# Allegro board AVRUSB500_new.brd
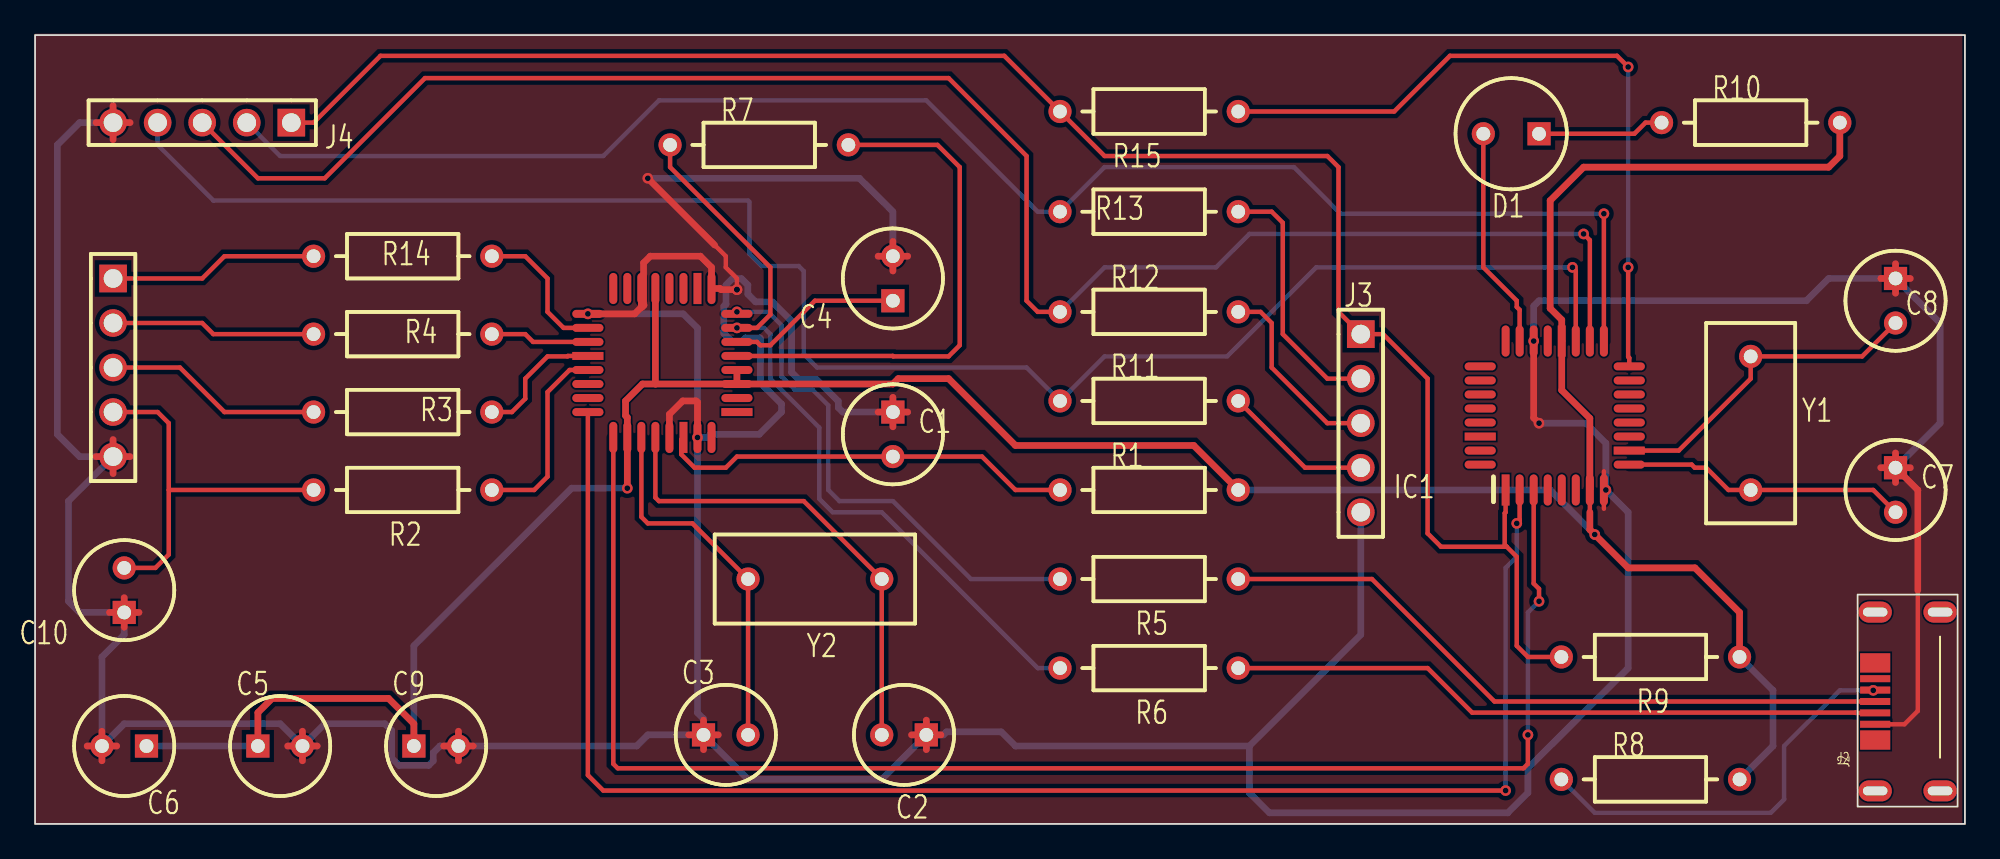
[diagram p0: board, top side]
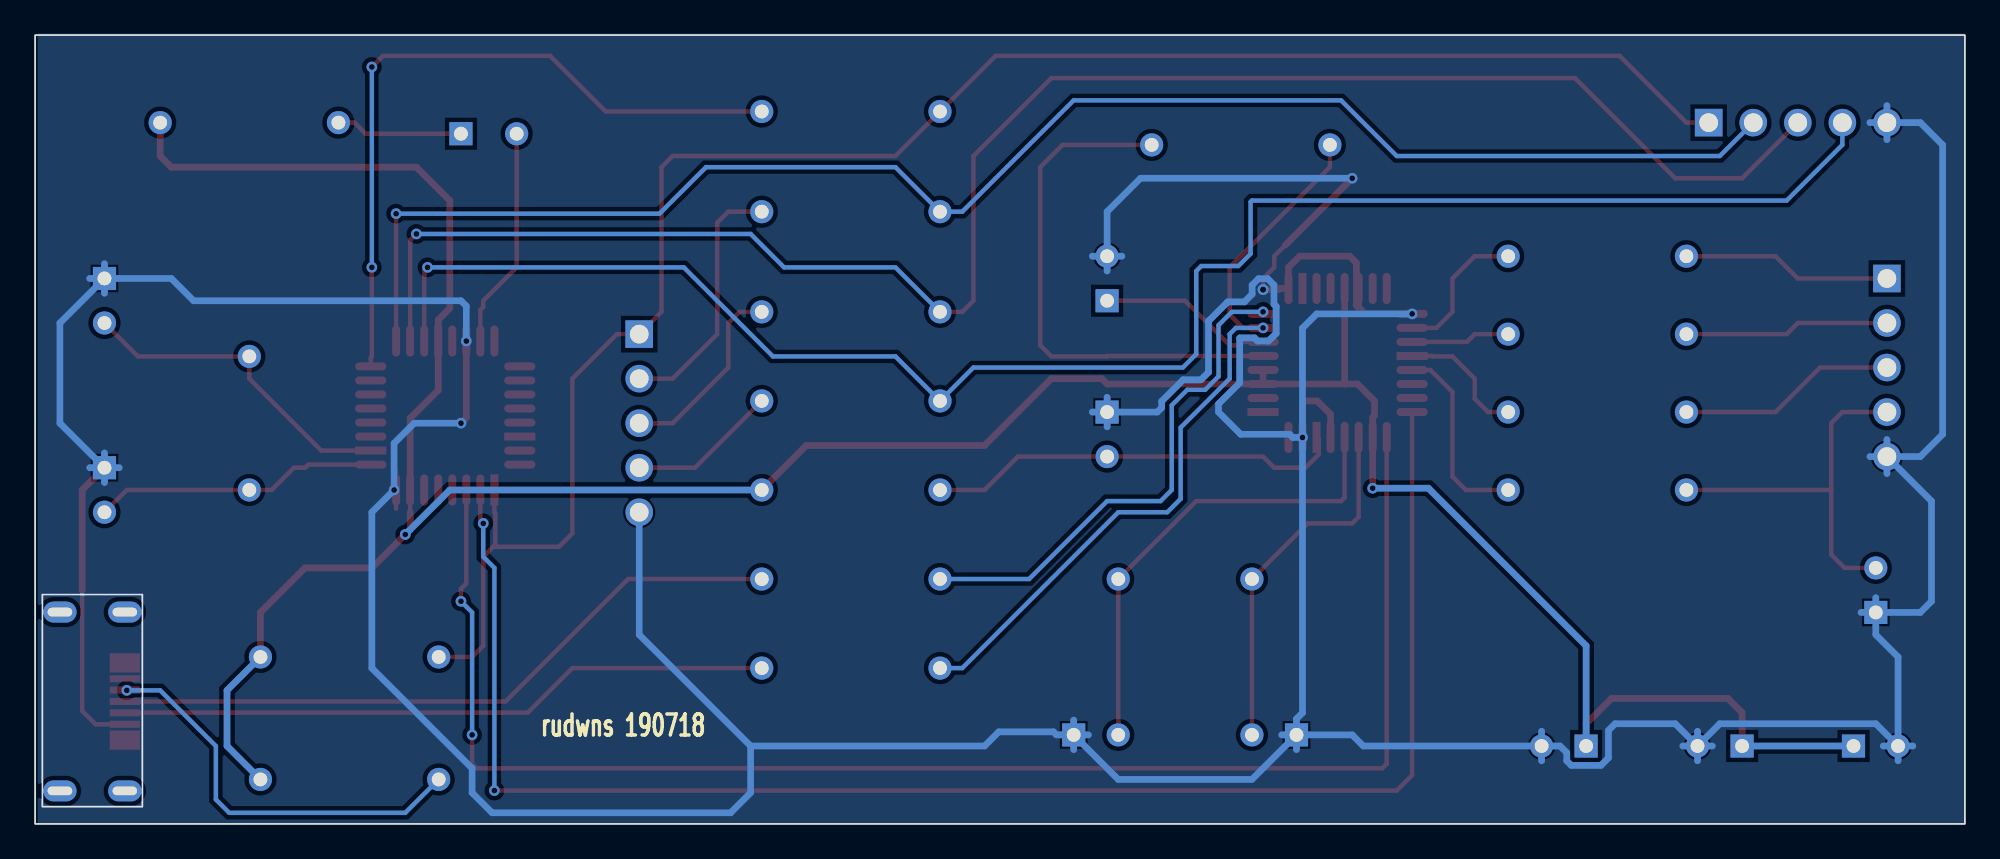
[diagram p1: board, bottom side, seen from below]

Outline 110 x 45 mm; copper layers: TOP, BOTTOM. Coordinates in mm from the lower left corner of the outline.
Outline path: rectangle 0,0 110,45

## Design rules (mm)
net group POWERNETS: nets VCC

## Placement (name value [footprint] x y rotation side)
C1  47nF  [CPCYL1D225LS100031]  48.9 23.5 270 top
C2  27pF  [CPCYL1D225LS100031]  50.8 5.08 180 top
C3  27pF  [CPCYL1D225LS100031]  38.1 5.08 0 top
C4  47nF  [CPCYL1D225LS100031]  48.9 29.84 90 top
C5  100nF  [CPCYL1D225LS100031]  12.7 4.45 0 top
C6  1uF  [CPCYL1D225LS100031]  6.35 4.45 180 top
C7  100nF  [CPCYL1D225LS100031]  106.05 20.32 270 top
C8  100nF  [CPCYL1D225LS100031]  106.05 31.11 270 top
C9  100nF  [CPCYL1D225LS100031]  21.59 4.45 0 top
C10  22nF  [CPCYL1D225LS100031]  5.08 12.06 90 top
D1  LED  [CYLD250LS125031]  85.72 39.37 180 top
IC1  ATmega8  [QUAD80M32WG900]  83.82 19.05 0 top
J1  bbpg_Bitbang  [BLKCON100VHTM1SQSW1005]  4.45 31.11 270 top
J2  USBA  [MY_USB]  108.58 6.99 90 top
J3  avrusb500_out  [BLKCON100VHTM1SQSW1005]  75.56 27.94 270 top
J4  firmware_in  [BLKCON100VHTM1SQSW1005]  14.61 40.01 180 top
NOREF  -  []  0 45 0 top
NOREF#2  -  []  110 0 90 top
R1  470  [AX400X100031]  58.42 19.05 0 top
R2  220  [AX400X100031]  26.04 19.05 180 top
R3  220  [AX400X100031]  26.04 23.5 180 top
R4  220  [AX400X100031]  26.04 27.94 180 top
R5  27  [AX400X100031]  68.58 13.97 180 top
R6  27  [AX400X100031]  68.58 8.89 180 top
R7  1.5k  [AX400X100031]  36.2 38.73 0 top
R8  2.2  [AX400X100031]  87 2.54 0 top
R9  10k  [AX400X100031]  97.16 9.53 180 top
R10  470  [AX400X100031]  92.71 40.01 0 top
R11  1k  [AX400X100031]  58.42 24.13 0 top
R12  220  [AX400X100031]  58.42 29.21 0 top
R13  1k  [AX400X100031]  58.42 34.92 0 top
R14  220  [AX400X100031]  26.04 32.38 180 top
R15  220  [AX400X100031]  68.58 40.64 180 top
U1  FT232BM  [QUAD80M32WG900]  40.01 23.5 90 top
Y1  3.6864Mhz  [RAD450X200LS300031]  97.79 26.67 270 top
Y2  6Mhz  [RAD450X200LS300031]  48.26 13.97 180 top

## Library data of the parts
C1-C5 C7-C10 = CAPACITOR NON-POL: alternate symbols: (SMDCAP)
C6 = CAPACITOR POL: alternate symbols: (SMDCAP)
D1 = LED
IC1 = ATmega8-DIL28_1
J1 J3 J4 = CON5
J2 = CON4_7
R1-R15 = R: alternate symbols: (SMDRES)
U1 = FT232BM_2: alternate symbols: (JEDECMS026)
Y1 Y2 = ZTA

## Footprints (pads in the part's own frame, mm; a bottom-side part is the same pattern mirrored in y, then rotated)
AX400X100031
  round 1.321 hole 0.787: 1(0,0) 2(10.16,0)
BLKCON100VHTM1SQSW1005
  rect 1.575x1.575 hole 1.067: 1(0,0)
  round 1.575 hole 1.067: 2(2.54,0) 3(5.08,0) 4(7.62,0) 5(10.16,0)
CPCYL1D225LS100031
  rect 1.321x1.321 hole 0.787: 1(0,0)
  round 1.321 hole 0.787: 2(2.54,0)
CYLD250LS125031
  rect 1.321x1.321 hole 0.787: 1(0,0)
  round 1.321 hole 0.787: 2(3.175,0)
MY_USB
  oval 1.2x1.9 hole 0.5x1.4: (-5.1,3.7) (-5.1,0) (5.1,3.7) (5.1,0)
  rect 1.1x1.72 smd: (-2.2,3.7) (2.2,3.7)
  rect 0.4x1.72 smd: 1(-1.3,3.7) 2(-0.65,3.7) 3(0,3.7) 4(0.65,3.7) 5(1.3,3.7)
QUAD80M32WG900
  rect 0.457x1.778 smd: 1(0,0) 20(3.2,8.496)
  oval 0.457x1.778 smd: 2(0.8,0) 3(1.6,0) 4(2.4,0) 5(3.2,0) 6(4,0) 7(4.801,0) 8(5.601,0) 17(5.601,8.496) 18(4.801,8.496) 19(4,8.496) 21(2.4,8.496) 22(1.6,8.496) 23(0.8,8.496) 24(0,8.496)
  oval 1.778x0.457 smd: 9(7.048,1.448) 11(7.048,3.048) 12(7.048,3.848) 13(7.048,4.648) 14(7.048,5.448) 15(7.048,6.248) 16(7.048,7.048) 25(-1.448,7.048) 26(-1.448,6.248) 27(-1.448,5.448) 28(-1.448,4.648) 29(-1.448,3.848) 31(-1.448,2.248) 32(-1.448,1.448)
  rect 1.778x0.457 smd: 10(7.048,2.248) 30(-1.448,3.048)
RAD450X200LS300031
  round 1.321 hole 0.787: 1(0,0) 2(7.62,0)

## Nets
+5V: J2.4 R8.1
GND: C1.1 C2.1 C3.1 C4.2 C5.2 C6.2 C7.1 C8.1 C9.2 C10.1 IC1.8(GND) IC1.22(AGND) J1.5 J2.1 J3.5 J4.5 U1.9(GND) U1.14(PWRCTL) U1.17(GND1) U1.29(AGND) U1.31(TEST)
VCC: C5.1 C6.1 C9.1 IC1.7(VCC) IC1.20(AVCC) R1.2 R8.2 R9.1 R10.2 U1.3(VCC) U1.4(RESET#) U1.13(VCC-IO) U1.26(VCC1)
BMISO: J1.3 R3.2
BMOSI: J1.2 R4.2
BRESET: J1.1 R14.2
BSCK: C10.2 J1.4 R2.2
D+: J2.2 R6.1
D-: J2.3 R5.1
F_MISO: IC1.18((MISO) PB4) J4.3 R12.1
F_MOSI: IC1.17((OC2/MOSI) PB3) J4.2 R13.1
F_SCK: IC1.19((SCK) PB5) J4.4 R11.1
MISO: J3.3 R12.2
MOSI: J3.2 R13.2
RESET: IC1.1(PC6 (R\E\S\E\T\)) J3.1 J4.1 R9.2 R15.2
RXD: IC1.2(PD0 (RXD)) U1.24(RXD)
SCK: J3.4 R11.2
TXD: IC1.3(PD1 (TXD)) U1.25(TXD)
N02483: R6.2 R7.1 U1.7(USBDP)
N02615: R5.2 U1.8(USBDM)
N03527: C4.1 U1.6(3V3OUT)
N06839: R2.1 U1.21(DTR#)
N06967: R3.1 U1.20(DSR#)
N07033: R4.1 U1.19(DCD#)
N07247: R14.1 U1.18(RI#)
N11951: R7.2 U1.5(RSTOUT#)
N15182: C7.2 IC1.9(PB6 (XT1/TOSC1)) Y1.2
N15289: C8.2 IC1.10(PB7 (XT2/TOSC2)) Y1.1
N19734: D1.2(CATHODE) IC1.23((ADC0) PC0)
N20572: D1.1(ANODE) R10.1
N22544: IC1.16((SS/OC1B) PB2) R15.1
N41098: C3.2 U1.27(XTIN) Y2.2
N41106: C2.2 U1.28(XTOUT) Y2.1
N49165: C1.2 R1.1 U1.30(AVCC)

Pads without a net: IC1 4 5 6 11 12 13 14 15 21 24 25 26 27 28 29 30 31 32; J2 5; U1 1 2 10 11 12 15 16 22 23 32

## Via types
v1: diameter 0.61, hole 0.33, TOP to BOTTOM, 22 vias

## Routing (per net, layer and track width the routed paths; a pad name or vN(x,y) marks a point on that pad's centre or on a via; arc(x,y) is an arc through that point)
+5V: length 23.2
  BOTTOM w0.254: v1(104.78,7.62) 102.87,7.62 99.69,4.45 99.69,1.4 98.93,0.64 88.9,0.64 R8.1
GND: length 416.7
  TOP w0.254: 89.42,17.98 IC1.8 89.42,20.12 ; 38.73,33.02 39.37,32.38 39.37,31.75 40.01,31.11 v1(40.01,30.48) ; 107.31,13.34 107.31,6.45 106.55,5.68 104.89,5.68
  TOP w0.381: 2.97,4.45 C6.2 ; C6.2 3.81,3.6 ; C6.2 3.81,5.29 ; C6.2 4.65,4.45 ; 48.9,31.54 C4.2 ; C4.2 49.74,32.38 ; C4.2 48.05,32.38 ; C4.2 48.9,33.23 ; 48.05,23.5 C1.1 ; C1.1 48.9,24.34 ; C1.1 48.9,22.65 ; C1.1 49.74,23.5 ; 3.48,40.01 J4.5 ; J4.5 5.41,40.01 ; J4.5 4.45,40.97 ; J4.5 4.45,39.04 ; 106.05,30.27 C8.1 ; C8.1 105.2,31.11 ; C8.1 106.89,31.11 ; C8.1 106.05,31.96 ; 105.2,20.32 C7.1 ; C7.1 106.05,21.16 ; C7.1 107.31,19.05 107.31,13.34 ; C7.1 106.89,20.32 ; C7.1 106.05,19.48 ; C5.2 16.08,4.45 ; C5.2 14.4,4.45 ; C5.2 15.24,3.6 ; C5.2 15.24,5.29 ; 37.26,5.08 C3.1 ; C3.1 38.1,4.24 ; C3.1 38.94,5.08 ; C3.1 38.1,5.92 ; 3.48,20.95 4.45,20.95 ; 4.45,20.95 4.45,19.99 ; 4.45,20.95 4.45,21.92 ; 4.45,20.95 5.41,20.95 ; C10.1 5.08,12.91 ; C10.1 5.92,12.06 ; C10.1 4.24,12.06 ; C10.1 5.08,11.22 ; C2.1 50.8,5.92 ; C2.1 50.8,4.24 ; C2.1 49.96,5.08 ; C2.1 51.64,5.08 ; v1(34.92,36.83) 38.73,33.02 ; C9.2 24.97,4.45 ; C9.2 24.13,5.29 ; C9.2 23.29,4.45 ; C9.2 24.13,3.6
  TOP w0.382: v1(37.76,22.05) 37.76,24.05 37.68,24.13 36.92,24.13 36.16,23.37 U1.29 ; 34.56,29.48 34.18,29.1 v1(31.51,29.1) ; 34.56,29.48 34.59,29.48 34.7,29.59 34.68,29.6 34.68,32 35.07,32.38 37.92,32.38 38.56,31.75 U1.9 39.04,30.54 39.1,30.48 v1(40.01,30.48) ; 34.56,29.48 U1.14 ; v1(85.42,27.55) 85.42,23.16 v1(85.72,22.86)
  BOTTOM w0.381: 106.05,30.27 C8.1 ; C8.1 106.05,31.96 ; C8.1 106.89,31.11 ; C8.1 102.23,31.11 100.97,29.84 85.72,29.84 85.42,29.54 v1(85.42,27.55) ; 50.8,4.24 C2.1 ; C2.1 51.78,5.08 51.95,5.25 55.07,5.25 55.88,4.45 69.22,4.45 ; C2.1 49.96,5.08 ; C2.1 50.8,5.92 ; C5.2 16.08,4.45 ; C5.2 15.24,5.29 ; C5.2 14.4,4.45 ; C5.2 15.24,3.6 ; 5.08,12.91 C10.1 5.92,12.06 ; 69.22,4.45 75.56,10.79 J3.5 ; 69.22,4.45 69.22,1.78 70.36,0.64 83.95,0.64 85.09,1.78 85.09,3.17 90.81,8.89 90.81,17.78 v1(89.53,19.05) 89.53,21.72 88.39,22.86 v1(85.72,22.86) ; 105.2,20.32 C7.1 ; C7.1 106.05,19.48 ; C7.1 106.05,21.16 ; C7.1 106.89,20.32 ; 48.05,32.38 C4.2 ; C4.2 49.74,32.38 ; C4.2 48.9,34.92 46.99,36.83 v1(34.92,36.83) ; C4.2 48.9,31.54 ; 38.1,4.24 C3.1 38.94,5.08 ; 24.13,3.6 C9.2 24.13,5.29 ; 4.45,20.95 5.41,20.95 ; 4.45,20.95 4.45,19.99 ; 4.45,20.95 4.45,21.92 ; C1.1 48.9,24.34 ; C1.1 49.74,23.5 ; C1.1 48.9,22.65 ; 3.81,3.6 C6.2 ; C6.2 2.97,4.45 ; C6.2 4.65,4.45 ; J4.5 4.45,40.97 ; J4.5 5.41,40.01 ; J4.5 4.45,39.04
  BOTTOM w0.382: J4.5 2.54,40.01 1.27,38.73 1.27,22.23 2.54,20.95 4.45,20.95 1.91,18.41 1.91,12.7 2.54,12.06 C10.1 5.08,10.79 3.81,9.53 C6.2 5.08,5.71 13.97,5.71 C5.2 16.51,5.71 19.94,5.71 20.32,5.33 20.32,3.76 20.75,3.34 22.43,3.34 22.7,3.6 22.7,4.06 23.08,4.45 C9.2 34.29,4.45 34.92,5.08 C3.1 ; v1(37.76,22.05) 37.76,6.34 38.1,6 C3.1 ; v1(37.76,22.05) 37.76,28.28 36.94,29.1 v1(31.51,29.1) ; v1(37.76,22.05) 38.32,22.05 38.49,22.23 41.27,22.23 42.55,23.5 42.55,23.96 41.34,25.16 41.34,27.7 41.32,27.72 40.49,27.72 40.32,27.55 39.69,27.55 39.26,27.98 39.26,29.52 39.38,29.65 39.38,30.74 39.75,31.1 40.26,31.1 40.63,30.74 40.63,30.22 41.07,29.78 42.02,29.78 43.12,28.68 43.12,25.76 43.54,25.34 44.56,25.34 45.78,24.11 45.78,23.75 46.04,23.5 C1.1 ; C3.1 40.64,2.54 48.26,2.54 C2.1 ; C8.1 108.58,28.57 108.58,22.86 C7.1
VCC: length 172.4
  TOP w0.254: IC1.7 88.62,17.78
  TOP w0.381: 88.62,17.78 88.62,16.79 v1(88.9,16.51) 90.81,14.61 94.61,14.61 97.16,12.06 R9.1 ; C5.1 12.7,6.35 13.51,7.16 20.15,7.16 21.59,5.71 C9.1
  TOP w0.382: U1.3 U1.4 ; U1.3 48.9,25.09 49.2,25.4 52.07,25.4 55.88,21.59 66.04,21.59 R1.2 ; U1.3 35.36,25.09 ; U1.13 35.36,25.1 35.36,25.09 ; IC1.7 88.62,23.14 87.02,24.74 IC1.20 87.02,28.75 86.36,29.41 86.36,35.56 88.27,37.47 102.23,37.47 102.87,38.1 R10.2 ; 35.36,25.09 34.62,25.09 33.66,24.13 33.66,23.29 33.76,23.19 v1(33.76,19.15)
  BOTTOM w0.381: v1(88.9,16.51) 86.36,19.05 R1.2
  BOTTOM w0.382: C9.1 21.59,10.16 30.58,19.15 v1(33.76,19.15) ; C6.1 C5.1 ; R9.1 99.06,7.62 99.06,4.45 R8.2
BMISO: length 12.5
  TOP w0.254: R3.2 10.79,23.5 8.26,26.04 4.45,26.04
BMOSI: length 11.7
  TOP w0.254: R4.2 10.16,27.94 9.53,28.57 J1.2
BRESET: length 12
  TOP w0.254: R14.2 10.79,32.38 9.53,31.11 J1.1
BSCK: length 22
  TOP w0.254: 7.62,19.05 7.62,15.37 6.86,14.61 C10.2 ; 7.62,19.05 7.62,22.86 6.99,23.5 4.45,23.5 ; 7.62,19.05 R2.2
D+: length 37.4
  TOP w0.254: J2.2 103.77,6.33 103.76,6.35 81.92,6.35 79.38,8.89 R6.1
D-: length 39.2
  TOP w0.254: J2.3 83.19,6.99 76.2,13.97 R5.1
F_MISO: length 100.9
  TOP w0.254: v1(88.27,33.66) 88.62,33.3 IC1.18 ; R12.1 57.15,29.21 56.52,29.84 56.52,38.1 52.07,42.55 22.23,42.55 16.51,36.83 12.7,36.83 J4.3
  BOTTOM w0.254: v1(88.27,33.66) 69.22,33.66 67.31,31.75 60.96,31.75 R12.1
F_MOSI: length 91.5
  TOP w0.254: IC1.17 v1(89.42,34.81)
  BOTTOM w0.254: v1(89.42,34.81) 74.41,34.81 71.75,37.47 60.96,37.47 R13.1 57.15,34.92 50.8,41.27 35.56,41.27 32.38,38.1 13.97,38.1 12.06,40.01
F_SCK: length 99.9
  TOP w0.254: IC1.19 87.82,31.56 v1(87.63,31.75)
  BOTTOM w0.254: J4.4 6.99,38.73 10.16,35.56 40.64,35.56 40.72,35.48 40.72,32.52 41.41,31.83 43.52,31.83 43.81,31.54 43.81,26.8 44.58,26.04 56.52,26.04 R11.1 60.96,26.67 67.94,26.67 73.03,31.75 v1(87.63,31.75)
MISO: length 11.1
  TOP w0.254: R12.2 69.85,29.21 70.48,28.57 70.48,26.04 73.66,22.86 J3.3
MOSI: length 14.7
  TOP w0.254: J3.2 73.66,25.4 71.12,27.94 71.12,34.29 70.48,34.92 R13.2
RESET: length 104.5
  TOP w0.254: 87,9.53 85.09,9.53 84.45,10.16 84.45,15.24 83.88,15.81 ; J4.1 15.88,40.01 19.68,43.81 55.24,43.81 R15.2 60.96,38.1 73.66,38.1 74.3,37.47 74.3,29.21 J3.1 76.83,27.94 79.38,25.4 79.38,16.57 80.14,15.81 83.88,15.81 ; IC1.1 83.82,17.78 83.77,17.73 83.77,15.93 83.88,15.81
RXD: length 90.9
  TOP w0.254: IC1.2 84.62,17.31 v1(84.45,17.14) ; v1(83.82,1.91) 32.38,1.91 31.51,2.78 U1.24
  BOTTOM w0.254: v1(83.82,1.91) 83.82,14.61 84.45,15.24 v1(84.45,17.14)
SCK: length 8.6
  TOP w0.254: R11.2 72.39,20.32 J3.4
TXD: length 87
  TOP w0.254: v1(85.72,12.7) 85.72,13.41 85.42,13.72 IC1.3 ; U1.25 32.96,3.43 33.21,3.17 84.84,3.17 85.09,3.43 v1(85.09,5.08)
  BOTTOM w0.254: v1(85.09,5.08) 85.09,12.06 v1(85.72,12.7)
N02483: length 44.6
  TOP w0.254: R7.1 36.2,37.47 41.91,31.75 41.91,29.06 41.15,28.3 v1(40.01,28.3)
  BOTTOM w0.254: v1(40.01,28.3) 41.55,28.3 41.91,27.94 41.91,25.4 44.7,22.61 44.7,18.54 45.47,17.78 48.26,17.78 57.15,8.89 R6.2
N02615: length 29.3
  BOTTOM w0.254: R5.2 53.34,13.97 48.9,18.41 45.85,18.41 45.21,19.05 45.21,23.88 44.32,24.77 43.31,24.77 42.55,25.53 42.55,28.45 41.78,29.21 v1(40.01,29.21)
N03527: length 10
  TOP w0.254: C4.1 44.45,29.84 41.91,27.3 41.34,27.3 41.15,27.5 U1.6
N06839: length 11.1
  TOP w0.254: R2.1 28.45,19.05 29.21,19.81 29.21,24.64 30.47,25.89 U1.21
N06967: length 7.5
  TOP w0.254: U1.20 30.37,26.7 30.34,26.67 29.21,26.67 27.94,25.4 27.94,24.26 27.18,23.5 R3.1
N07033: length 5.7
  TOP w0.254: U1.19 28.39,27.5 27.94,27.94 R4.1
N07247: length 8.3
  TOP w0.254: R14.1 27.94,32.38 29.21,31.11 29.21,29.21 30.12,28.3 U1.18
N11951: length 30
  TOP w0.254: R7.2 51.44,38.73 52.7,37.47 52.7,27.3 52.07,26.67 48.92,26.67 48.9,26.7 U1.5
N15182: length 16.3
  TOP w0.254: C7.2 104.78,19.05 Y1.2 96.52,19.05 95.25,20.32 94.6,20.32 94.42,20.5 IC1.9
N15289: length 18.9
  TOP w0.254: IC1.10 93.69,21.3 97.79,25.4 Y1.1 104.14,26.67 C8.2
N19734: length 12.7
  TOP w0.254: IC1.23 84.62,29.32 84.45,29.49 84.45,29.84 82.55,31.75 D1.2
N20572: length 7.2
  TOP w0.254: R10.1 91.79,40.01 91.16,39.37 D1.1
N22544: length 40.9
  TOP w0.254: v1(90.81,43.18) 90.17,43.81 80.64,43.81 77.47,40.64 R15.1 ; v1(90.81,31.75) 90.81,26.64 90.87,26.58 IC1.16
  BOTTOM w0.254: v1(90.81,43.18) v1(90.81,31.75)
N41098: length 21
  TOP w0.254: C3.2 Y2.2 37.47,17.14 34.92,17.14 34.56,17.51 U1.27
N41106: length 27.1
  TOP w0.254: C2.2 Y2.1 43.81,18.41 35.56,18.41 35.36,18.62 U1.28
N49165: length 24
  TOP w0.254: R1.1 55.88,19.05 53.98,20.95 C1.2 40.01,20.95 39.37,20.32 37.59,20.32 36.83,21.08 36.83,21.92 U1.30

## Copper pours and planes (outline as drawn; the poured copper is in the pictures)
GND on TOP, BOTTOM: 0,45.09 0,0 109.86,0 109.86,45.09

## Text on the board
Ref Des/Silkscreen Bottom: rudwns 190718
DIMENSION: FIGURE | SIZE | 0.33 | 0.787 | 1.067 | 1.4x0.5 | DRILL CHART: TOP to BOTTOM | ALL UNITS ARE IN MILLIMETERS | PLATED | QTY | 28 | 56 | 15 | 4
